# EAGLE board PCB_Openbook (EAGLE 9.7.0)
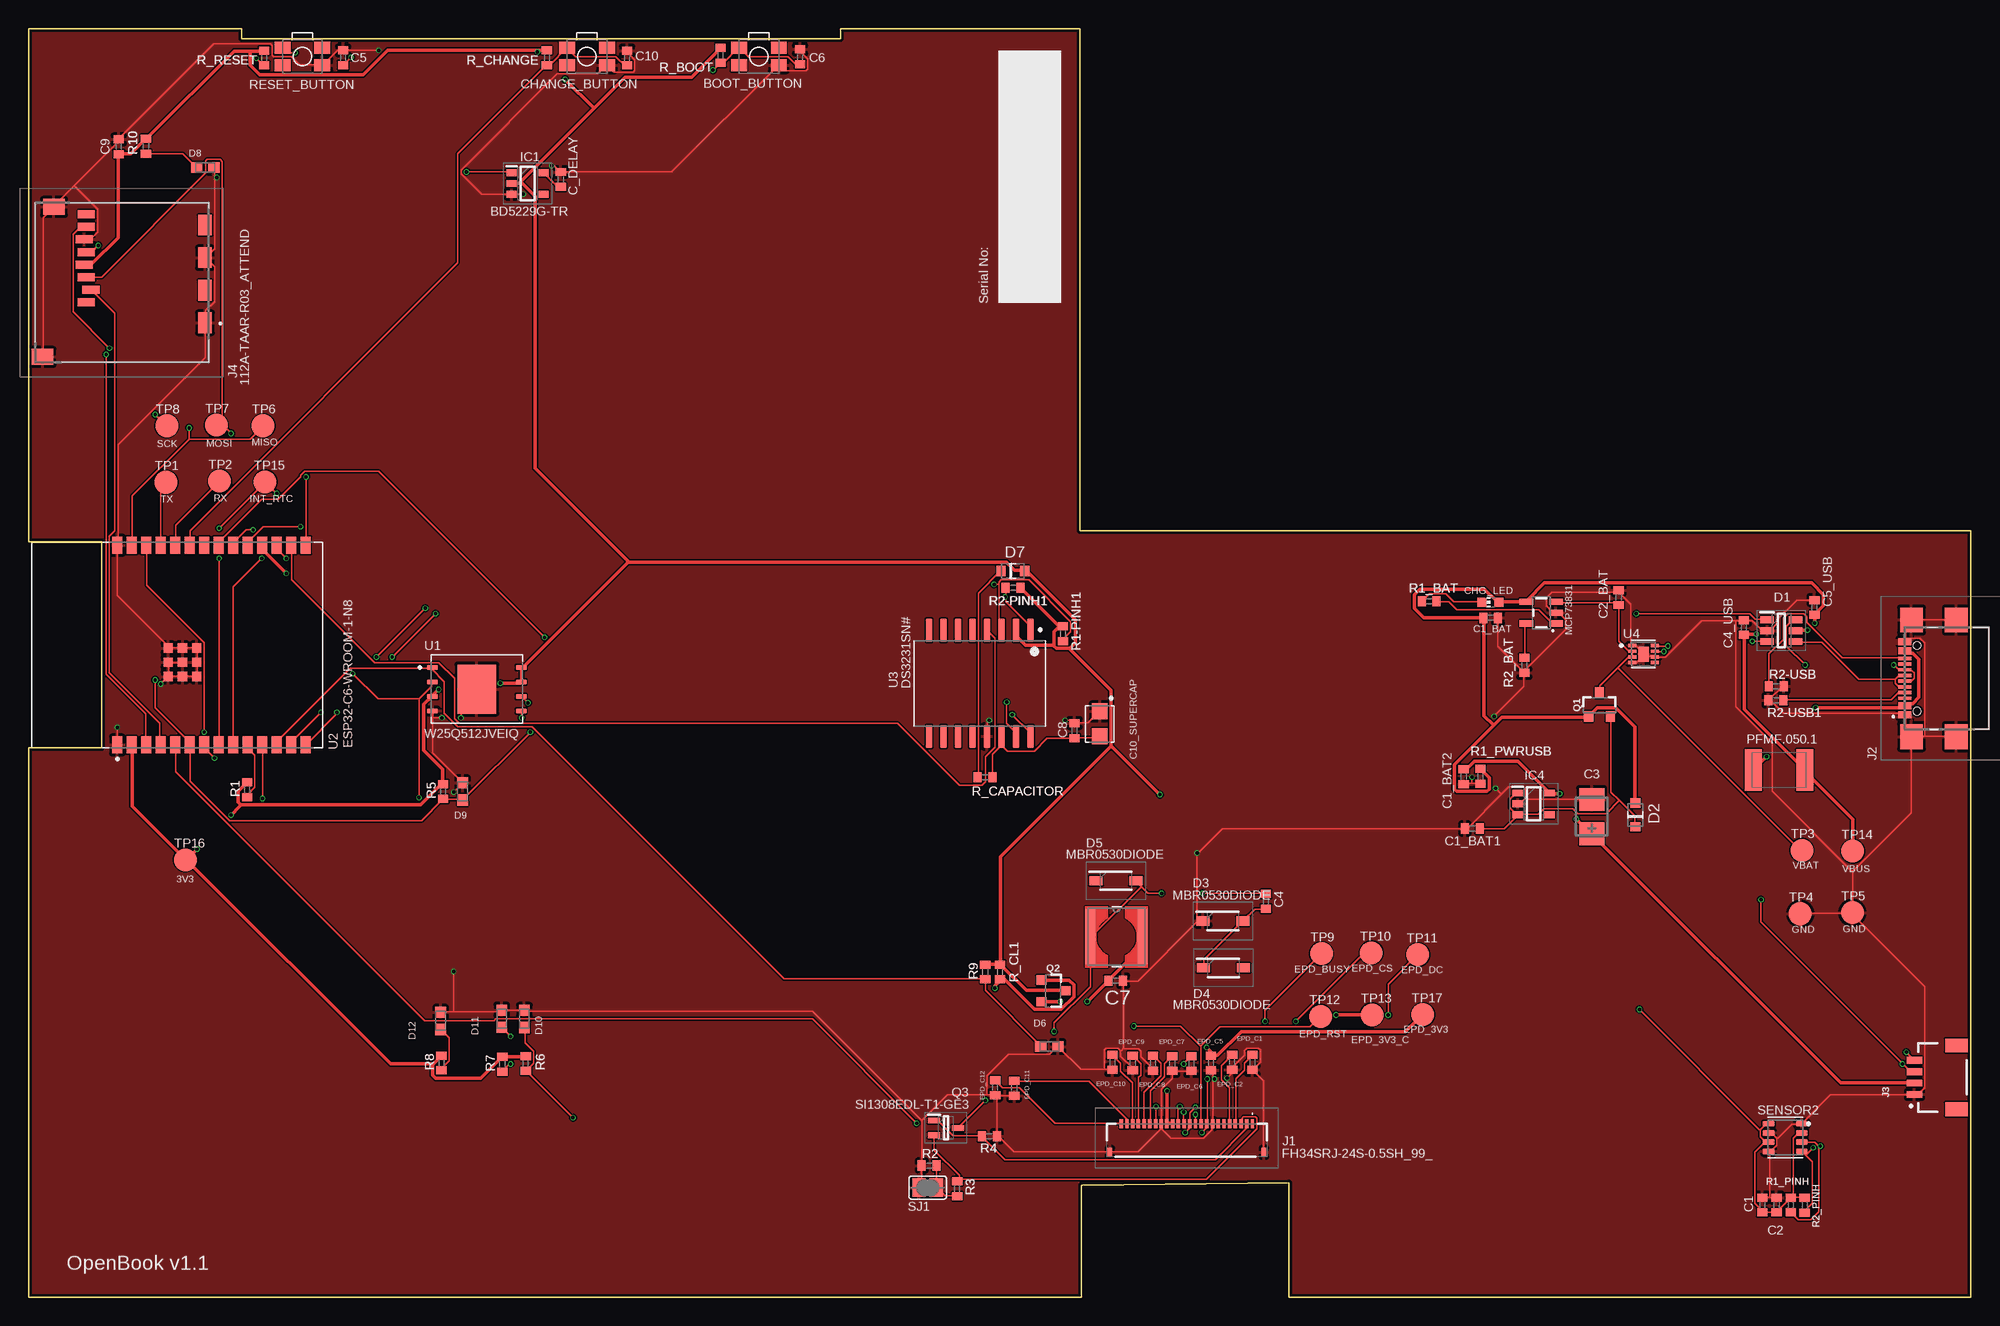
[diagram p0: board, top side]
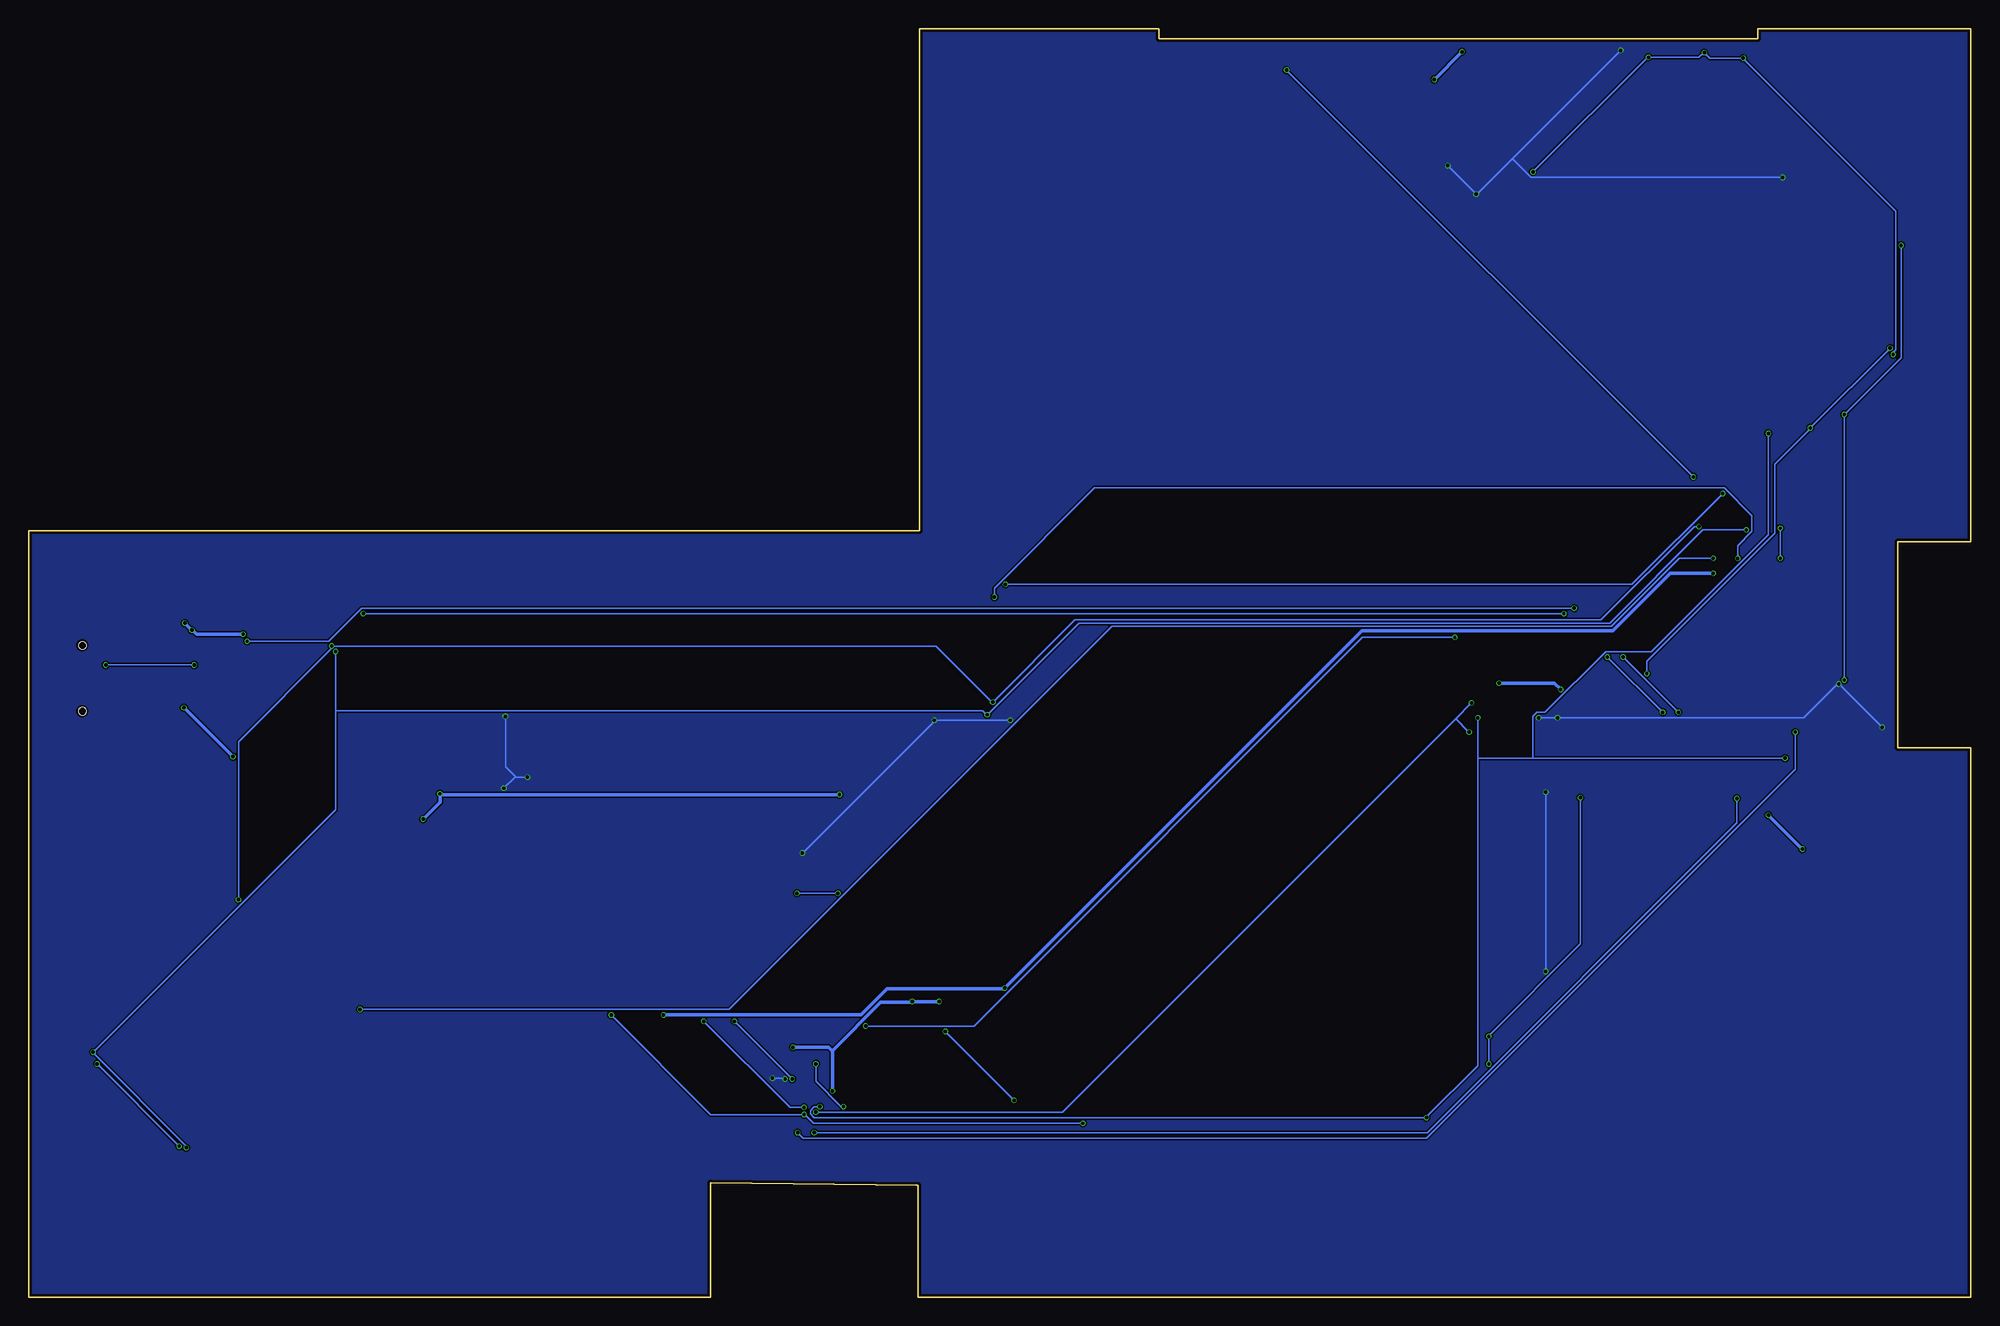
[diagram p1: board, bottom side, seen from below]

Size 170.3 x 111.2 mm. Coordinates in mm from the lower left corner, seen from the top.
Outline: 0,111.2 18.7,111.2 18.7,110.3 71.2,110.3 71.2,111.2 92.2,111.2 92.2,67.2 170.3,67.2 170.3,0.01 110.5,0.01 110.5,10.01 92.39,9.81 92.3,9.81 92.3,0 0,0 0,48.15 6.4,48.15 6.4,66.2 0,66.2 0,111.2
Copper layers (1*16): Top 0.035mm / dielectric 1.6mm / Bottom 0.035mm
Design rules "jlcpcb-2layers.dru": minimum track width 0.15mm, minimum drill 0.3mm, track to track 5mil, track to pad 5mil, pad to pad 5mil, via to via 5mil, smd to smd 5mil, copper to edge 0.2mm, drill to drill 0.2mm, minimum pad ring 10mil, minimum via ring 3mil, stop-mask expansion 4mil, vias tented up to drill 0mil, thermal gap 10mil
Net classes: 1 power: width 0.3 mm

## Footprints (pad centres in the part's own frame; a part is rotated, then mirrored left to right if it is on the bottom)
MYBUTTON = smd 1.4 x 1.05: 1 1.75,0.75; 2 -1.75,0.75; 3 -1.75,-0.75; 4 1.75,-0.75
EAGLE-LTSPICE_C0402 = smd 0.7 x 0.9: 1 -0.65,0; 2 0.65,0
RCL_CT3528 = smd 2 x 2.2: + -1.5,0; - 1.5,0
CAPCP3225X100N = smd 1.4 x 1.4: 1 -1.1,0; 2 1.1,0
ADAFRUIT_CHIP-LED0603 = smd 0.8 x 0.8: A 0,-0.75; C 0,0.75
SOT95P280X145-6N = smd 1.2 x 0.6: 1 -1.25,0.95; 2 -1.25,0; 3 -1.25,-0.95; 4 1.25,-0.95; 5 1.25,0; 6 1.25,0.95
ESP32_WROVER_AVX---SD0805S020S1R0_AVX_SD0805S020S1R0_0 = smd 0.8 x 0.9: 1 -1.05,0; 2 1.05,0
SOD3716X135N = smd 1.15 x 0.8: 1 -1.75,0; 2 1.75,0
DIOC1608X36N = smd 0.97 x 0.94: 1 -0.75,0; 2 0.75,0
SOT95P280X125-5N = smd 0.9 x 0.6: 1 -1.4,0.95; 2 -1.4,0; 3 -1.4,-0.95; 4 1.4,-0.95; 5 1.4,0.95
SOT95P280X120-5N = smd 0.9 x 0.6: 1 -1.4,0.95; 2 -1.4,0; 3 -1.4,-0.95; 4 1.4,-0.95; 5 1.4,0.95
FH34SRJ24S05SH99 = smd 0.3 x 0.8: 1 5.75,1.45; 2 5.25,1.45; 3 4.75,1.45; 4 4.25,1.45; 5 3.75,1.45; 6 3.25,1.45; 7 2.75,1.45; 8 2.25,1.45; 9 1.75,1.45; 10 1.25,1.45; 11 0.75,1.45; 12 0.25,1.45; 13 -0.25,1.45; 14 -0.75,1.45; 15 -1.25,1.45; 16 -1.75,1.45; 17 -2.25,1.45; 18 -2.75,1.45; 19 -3.25,1.45; 20 -3.75,1.45; 21 -4.25,1.45; 22 -4.75,1.45; 23 -5.25,1.45; 24 -5.75,1.45 | smd 0.4 x 0.8: MP1 6.75,-1.05; MP2 -6.75,-1.05
SAMACSYS_PARTS_USB4110GFA = smd 0.3 x 1.15: A1 -3.35,3.678; A4 -2.55,3.678; A5 -1.25,3.678; A6 -0.25,3.678; A7 0.25,3.678; A8 1.25,3.678; A9 2.55,3.678; A12 3.35,3.678; B1 3.05,3.678; B4 2.25,3.678; B5 1.75,3.678; B6 0.75,3.678; B7 -0.75,3.678; B8 -1.75,3.678; B9 -2.25,3.678; B12 -3.05,3.678 | smd 2.18 x 2: MP1 -5.11,-0.827; MP2 5.11,-0.827; MP3 -5.11,3.103; MP4 5.11,3.103 | hole 0.65: -2.89,2.603; 2.89,2.603
JST04_1MM_RA = smd 0.6 x 1.35: 1 -1.5,0; 2 -0.5,0; 3 0.5,0; 4 1.5,0 | smd 1.2 x 2: NC1 2.8,-3.675; NC2 -2.8,-3.675
112ATAARR03ATTEND = smd 1.8 x 1.2: G1 10.6,10.4; G2 4.9,10.4; S1 7.75,10.4; S2 2.05,10.4 | smd 1.4 x 1.9: G3 13.6,-3.85; G4 0.45,-2.85 | smd 0.7 x 1.5: P1 8.8,0; P2 7.7,0.4; P3 6.6,0; P4 5.5,-0.2; P5 4.4,0; P6 3.3,-0.2; P7 2.2,0; P8 1.1,0
IND_4828-WE-TPC_WRE = smd 0.889 x 4.826: 1 -2.286,0; 2 2.286,0
ESP32_WROVER_SPARKFUN-IC-POWER_SOT23-5 = smd 0.55 x 1.2: 1 -0.95,-1.3; 2 0,-1.3; 3 0.95,-1.3; 4 0.95,1.3; 5 -0.95,1.3
ESP32C6_VARISTOR_CT/CN1812 = smd 1.5 x 3.6: 1 -2.25,0; 2 2.25,0
ESP32_WROVER_SPARKFUN-DISCRETESEMI_SOT23-3 = smd 0.8 x 0.9: 1 -0.95,-1; 2 0.95,-1; 3 0,1.1
SOT65P210X110-3N = smd 1.05 x 0.5: 1 -1.05,0.65; 2 -1.05,-0.65; 3 1.05,0
ESP32_WROVER_EAGLE-LTSPICE_R0402 = smd 0.7 x 0.9: 1 -0.65,0; 2 0.65,0
ESP32_WROVER_BME680_PSON80P300X300X100-8N = smd 1.016 x 0.5: 1 1.458,1.2; 2 1.458,0.4; 3 1.458,-0.4; 4 1.458,-1.2; 5 -1.458,-1.22; 6 -1.458,-0.4; 7 -1.458,0.4; 8 -1.458,1.2
SJ = smd 1.168 x 1.6: 1 -0.762,0; 2 0.762,0
TP20R = smd 2 x 2: TP 0,0
SON127P600X800X80-9N = smd 0.94 x 0.44: 1 -3.895,1.905; 2 -3.895,0.635; 3 -3.895,-0.635; 4 -3.895,-1.905; 5 3.895,-1.905; 6 3.895,-0.635; 7 3.895,0.635; 8 3.895,1.905 | smd 3.4 x 4.3: 9 0,0
XCVR_ESP32-C6-WROOM-1-N8 = smd 1.5 x 0.9: 1 -8.75,5.26; 2 -8.75,3.99; 3 -8.75,2.72; 4 -8.75,1.45; 5 -8.75,0.18; 6 -8.75,-1.09; 7 -8.75,-2.36; 8 -8.75,-3.63; 9 -8.75,-4.9; 10 -8.75,-6.17; 11 -8.75,-7.44; 12 -8.75,-8.71; 13 -8.75,-9.98; 14 -8.75,-11.25; 15 8.75,-11.25; 16 8.75,-9.98; 17 8.75,-8.71; 18 8.75,-7.44; 19 8.75,-6.17; 20 8.75,-4.9; 21 8.75,-3.63; 22 8.75,-2.36; 23 8.75,-1.09; 24 8.75,0.18; 25 8.75,1.45; 26 8.75,2.72; 27 8.75,3.99; 28 8.75,5.26 | smd 0.8 x 0.8: 29_1 -2.755,0.79; 29_2 -1.505,0.79; 29_3 -0.255,0.79; 29_4 -2.755,-0.46; 29_5 -1.505,-0.46; 29_6 -0.255,-0.46; 29_7 -2.755,-1.71; 29_8 -1.505,-1.71; 29_9 -0.255,-1.71
SOIC127P1032X265-16N = smd 2.05 x 0.59: 1 -4.655,4.445; 2 -4.655,3.175; 3 -4.655,1.905; 4 -4.655,0.635; 5 -4.655,-0.635; 6 -4.655,-1.905; 7 -4.655,-3.175; 8 -4.655,-4.445; 9 4.655,-4.445; 10 4.655,-3.175; 11 4.655,-1.905; 12 4.655,-0.635; 13 4.655,0.635; 14 4.655,1.905; 15 4.655,3.175; 16 4.655,4.445
SON50P200X200X80-9N = smd 0.76 x 0.27: 1 -0.985,0.75; 2 -0.985,0.25; 3 -0.985,-0.25; 4 -0.985,-0.75; 5 0.985,-0.75; 6 0.985,-0.25; 7 0.985,0.25; 8 0.985,0.75 | smd 0.9 x 1.3: 9 0,0

## Placement (x,y rotation side)
BOOT_BUTTON  BUTTON_CUSYOMV1BUTTON  [MYBUTTON]  64.03,108.75 180 top
C1  100nF  [EAGLE-LTSPICE_C0402]  152,8.08 90 top
C1_BAT  4.7uF  [EAGLE-LTSPICE_C0402]  128.18,59.54 0 top
C1_BAT1  4.7uF  [EAGLE-LTSPICE_C0402]  126.58,41.08 180 top
C1_BAT2  4.7uF  [EAGLE-LTSPICE_C0402]  125.82,45.62 270 top
C2  100nF  [EAGLE-LTSPICE_C0402]  153.25,8.08 90 top
C2_BAT  4.7uF  [EAGLE-LTSPICE_C0402]  139.41,61.32 90 top
C3  100uF TANT  [RCL_CT3528]  137.04,42.12 90 top
C4  4.7uF/25V  [EAGLE-LTSPICE_C0402]  108.49,34.7 90 top
C4_USB  100nF  [EAGLE-LTSPICE_C0402]  150.38,58.71 90 top
C5  1uF  [EAGLE-LTSPICE_C0402]  27.6,108.64 90 top
C5_USB  4.7uF  [EAGLE-LTSPICE_C0402]  156.58,60.46 90 top
C6  100nF  [EAGLE-LTSPICE_C0402]  67.65,108.72 90 top
C7  10uF  [EAGLE-LTSPICE_C0402]  95.31,27.74 0 top
C8  100nF  [EAGLE-LTSPICE_C0402]  91.71,49.66 90 top
C9  100nF  [EAGLE-LTSPICE_C0402]  7.91,100.84 90 top
C10  100nF  [EAGLE-LTSPICE_C0402]  52.49,108.62 90 top
C10_SUPERCAP  CPH3225A  [CAPCP3225X100N]  93.92,50.25 270 top
C_DELAY  100nF  [EAGLE-LTSPICE_C0402]  46.67,97.97 90 top
CHANGE_BUTTON  BUTTON_CUSYOMV1BUTTON  [MYBUTTON]  48.96,108.75 180 top
CHG_LED  [ADAFRUIT_CHIP-LED0603]  128.15,60.92 90 top
D1  USBLC6-2SC6Y  [SOT95P280X145-6N]  153.68,58.43 0 top
D2  SD0805S020S1R0  [ESP32_WROVER_AVX---SD0805S020S1R0_AVX_SD0805S020S1R0_0]  140.88,42.27 90 top
D3  MBR0530DIODE  [SOD3716X135N]  104.71,32.98 0 top
D4  MBR0530DIODE  [SOD3716X135N]  104.76,28.86 0 top
D5  MBR0530DIODE  [SOD3716X135N]  95.34,36.51 0 top
D6  PGB1010603MRDIODE  [DIOC1608X36N]  89.49,21.97 0 top
D7  SD0805S020S1R0  [ESP32_WROVER_AVX---SD0805S020S1R0_AVX_SD0805S020S1R0_0]  86.3,63.66 0 top
D8  PGB1010603MRDIODE  [DIOC1608X36N]  15.51,99.02 0 top
D9  PGB1010603MRDIODE  [DIOC1608X36N]  38.06,44.33 90 top
D10  PGB1010603MRDIODE  [DIOC1608X36N]  43.47,24.39 90 top
D11  PGB1010603MRDIODE  [DIOC1608X36N]  41.49,24.42 90 top
D12  PGB1010603MRDIODE  [DIOC1608X36N]  36.13,24.21 90 top
EPD_C1  1uF/50V  [EAGLE-LTSPICE_C0402]  107.3,20.58 90 top
EPD_C2  1uF/50V  [EAGLE-LTSPICE_C0402]  105.52,20.61 90 top
EPD_C5  0.1uF/50V  [EAGLE-LTSPICE_C0402]  103.67,20.53 90 top
EPD_C6  1uF/50V  [EAGLE-LTSPICE_C0402]  101.97,20.48 90 top
EPD_C7  1uF/50V  [EAGLE-LTSPICE_C0402]  100.27,20.48 90 top
EPD_C8  1uF/50V  [EAGLE-LTSPICE_C0402]  98.59,20.5 90 top
EPD_C9  1uF/50V  [EAGLE-LTSPICE_C0402]  96.81,20.53 90 top
EPD_C10  1uF/50V  [EAGLE-LTSPICE_C0402]  95.03,20.58 90 top
EPD_C11  1uF/50V  [EAGLE-LTSPICE_C0402]  86.42,18.32 90 top
EPD_C12  1uF/50V  [EAGLE-LTSPICE_C0402]  84.75,18.37 90 top
IC1  BD5229G-TR  [SOT95P280X125-5N]  43.75,97.62 0 top
IC4  XC6220A331MR-G  [SOT95P280X120-5N]  131.96,43.24 0 top
J1  FH34SRJ-24S-0.5SH_99_  [FH34SRJ24S05SH99]  101.56,13.75 0 top
J2  SAMACSYS_PARTS_USB4110-GF-A  [SAMACSYS_PARTS_USB4110GFA]  168.19,54.25 90 top
J3  QWIIC_RIGHT_ANGLE  [JST04_1MM_RA]  165.35,19.27 90 top
J4  112A-TAAR-R03_ATTEND  [112ATAARR03ATTEND]  5.08,96.01 270 top
L1  68uH  [IND_4828-WE-TPC_WRE]  95.39,31.58 0 top
MCP73831  ESP32_WROVER_SPARKFUN-IC-POWER_MCP73831  [ESP32_WROVER_SPARKFUN-IC-POWER_SOT23-5]  132.62,60 90 top
PFMF.050.1  ESP32C6_VARISTORCN1812  [ESP32C6_VARISTOR_CT/CN1812]  153.48,46.21 0 top
Q1  20V/4.2A/52mΩ/1.4W  [ESP32_WROVER_SPARKFUN-DISCRETESEMI_SOT23-3]  137.73,51.9 0 top
Q2  20V/4.2A/52mΩ/1.4W  [ESP32_WROVER_SPARKFUN-DISCRETESEMI_SOT23-3]  89.8,26.85 270 top
Q3  SI1308EDL-T1-GE3  [SOT65P210X110-3N]  80.43,14.84 0 top
R1  10K  [ESP32_WROVER_EAGLE-LTSPICE_R0402]  19.16,44.48 90 top
R1-PINH1  10K  [ESP32_WROVER_EAGLE-LTSPICE_R0402]  90.69,58.15 90 top
R1_BAT  200  [ESP32_WROVER_EAGLE-LTSPICE_R0402]  122.79,60.99 0 top
R1_PINH  10K  [ESP32_WROVER_EAGLE-LTSPICE_R0402]  154.49,8.08 90 top
R1_PWRUSB  100K  [ESP32_WROVER_EAGLE-LTSPICE_R0402]  127.29,45.65 90 top
R2  2.2  [ESP32_WROVER_EAGLE-LTSPICE_R0402]  78.95,11.54 0 top
R2-PINH1  10K  [ESP32_WROVER_EAGLE-LTSPICE_R0402]  86.32,62.19 0 top
R2-USB  5k1  [ESP32_WROVER_EAGLE-LTSPICE_R0402]  153.22,53.55 0 top
R2-USB1  5k1  [ESP32_WROVER_EAGLE-LTSPICE_R0402]  153.2,52.33 0 top
R2_BAT  2K  [ESP32_WROVER_EAGLE-LTSPICE_R0402]  131.15,55.38 90 top
R2_PINH  10K  [ESP32_WROVER_EAGLE-LTSPICE_R0402]  155.71,8.06 90 top
R3  0.47  [ESP32_WROVER_EAGLE-LTSPICE_R0402]  81.42,9.51 90 top
R4  10K  [ESP32_WROVER_EAGLE-LTSPICE_R0402]  84.24,14.1 180 top
R5  10K  [ESP32_WROVER_EAGLE-LTSPICE_R0402]  36.36,44.33 90 top
R6  10K  [ESP32_WROVER_EAGLE-LTSPICE_R0402]  43.6,20.48 90 top
R7  10K  [ESP32_WROVER_EAGLE-LTSPICE_R0402]  41.54,20.43 90 top
R8  10K  [ESP32_WROVER_EAGLE-LTSPICE_R0402]  36.21,20.53 90 top
R9  10K  [ESP32_WROVER_EAGLE-LTSPICE_R0402]  83.88,28.5 90 top
R10  10K  [ESP32_WROVER_EAGLE-LTSPICE_R0402]  10.3,100.89 90 top
R_BOOT  10K  [ESP32_WROVER_EAGLE-LTSPICE_R0402]  60.67,108.84 90 top
R_CAPACITOR  15  [ESP32_WROVER_EAGLE-LTSPICE_R0402]  83.86,45.57 0 top
R_CHANGE  10K  [ESP32_WROVER_EAGLE-LTSPICE_R0402]  45.45,108.64 90 top
R_CL1  10K  [ESP32_WROVER_EAGLE-LTSPICE_R0402]  85.18,28.5 90 top
R_RESET  10K  [ESP32_WROVER_EAGLE-LTSPICE_R0402]  20.66,108.62 90 top
RESET_BUTTON  BUTTON_CUSYOMV1BUTTON  [MYBUTTON]  24.01,108.75 180 top
SENSOR2  BME688  [ESP32_WROVER_BME680_PSON80P300X300X100-8N]  154.01,14 0 top
SJ1  [SJ]  78.83,9.61 0 top
TP1  TPTP20R  [TP20R]  12.05,71.43 0 top
TP2  TPTP20R  [TP20R]  16.75,71.53 0 top
TP3  TPTP20R  [TP20R]  155.48,39.17 0 top
TP4  TPTP20R  [TP20R]  155.33,33.61 0 top
TP5  TPTP20R  [TP20R]  159.9,33.71 0 top
TP6  TPTP20R  [TP20R]  20.56,76.38 0 top
TP7  TPTP20R  [TP20R]  16.47,76.43 0 top
TP8  TPTP20R  [TP20R]  12.13,76.38 0 top
TP9  TPTP20R  [TP20R]  113.37,30.11 0 top
TP10  TPTP20R  [TP20R]  117.72,30.18 0 top
TP11  TPTP20R  [TP20R]  121.8,30.03 0 top
TP12  TPTP20R  [TP20R]  113.27,24.62 0 top
TP13  TPTP20R  [TP20R]  117.79,24.75 0 top
TP14  TPTP20R  [TP20R]  159.93,39.1 0 top
TP15  TPTP20R  [TP20R]  20.74,71.46 0 top
TP16  TPTP20R  [TP20R]  13.75,38.33 0 top
TP17  TPTP20R  [TP20R]  122.24,24.77 0 top
U1  W25Q512JVEIQ  [SON127P600X800X80-9N]  39.31,53.3 0 top
U2  ESP32-C6-WROOM-1-N8  [XCVR_ESP32-C6-WROOM-1-N8]  13.04,57.16 90 top
U3  DS3231SN#  [SOIC127P1032X265-16N]  83.4,53.8 270 top
U4  MAX17048G+T10  [SON50P200X200X80-9N]  141.59,56.37 0 top

## Library data of the parts
BOOT_BUTTON C1 C1_BAT C1_BAT1 C1_BAT2 C2 C2_BAT C4 C4_USB C5 C5_USB C6-C10 C_DELAY CHANGE_BUTTON CHG_LED D3-D6 D8-D12 EPD_C1 EPD_C2 EPD_C5-EPD_C12 PFMF.050.1 Q1 Q2 R1 R1-PINH1 R1_BAT R1_PINH R1_PWRUSB R2 R2-PINH1 R2-USB R2-USB1 R2_BAT R2_PINH R3-R10 R_BOOT R_CAPACITOR R_CHANGE R_CL1 R_RESET RESET_BUTTON SJ1 = DeskAssistant v19 v1
C3 = DeskAssistant v19 v1; SPICEPREFIX: C
C10_SUPERCAP = DeskAssistant v19 v1; AVAILABILITY: Not in stock; CHECK_PRICES: https://www.snapeda.com/parts/CPH3225A/Seiko+Instruments/view-part/?ref=eda; DESCRIPTION: 11 mF (EDLC) Supercapacitor 3.3 V 1210 (3225 Metric) - -; MF: Seiko Instruments; MP: CPH3225A; PACKAGE: 1210 Seiko; PRICE: None; PURCHASE-URL: https://www.snapeda.com/api/url_track_click_mouser/?unipart_id=562593&manufacturer=Seiko Instruments&part_name=CPH3225A&search_term=None; SNAPEDA_LINK: https://www.snapeda.com/parts/CPH3225A/Seiko+Instruments/view-part/?ref=snap
D1 = DeskAssistant v19 v1; AVAILABILITY: In Stock; CHECK_PRICES: https://www.snapeda.com/parts/USBLC6-2SC6Y/STMicroelectronics/view-part/?ref=eda; DESCRIPTION: 17V Clamp 5A (8/20µs) Ipp Tvs Diode Surface Mount SOT-23-6; MF: STMicroelectronics; MP: USBLC6-2SC6Y; PACKAGE: SOT-23-6 STMicroelectronics; PRICE: None; SNAPEDA_LINK: https://www.snapeda.com/parts/USBLC6-2SC6Y/STMicroelectronics/view-part/?ref=snap
D2 D7 = DeskAssistant v19 v1; CENTROID_NOT_SPECIFIED: No; DATASHEET: http://datasheets.avx.com/schottky.pdf; DIGIKEY_DESCRIPTION: DIODE SCHOTTKY 20V 1A 0805; DIGIKEY_PART_NUMBER: 478-7800-1-ND; LEAD_FREE: yes; MF: AVX; MOUSER_PART_NUMBER: 581-SD0805S020S1R0; PACKAGE: 0805 (2012 metric); PREFIX: D; ROHS: yes; TEMPERATURE_RANGE_HIGH: +125°C; TEMPERATURE_RANGE_LOW: -55°C
IC1 = DeskAssistant v19 v1; DESCRIPTION: Voltage Detector with Adjustable Delay Time: CMOS processes are utilized to develop high precision, low current consumption CMOS reset ICs that allow arbitrary setting of the delay time. The extensive lineup includes both Nch Open Drain and CMOS output types in a wide range of detection voltages (from 2.3V to 6.0V, in 0.1V steps), enabling selection of the ideal solution based on customer requirements. In addition, the entire series is of course both lead-free and RoHS-compliant.; HEIGHT: 1.25mm; MANUFACTURER_NAME: ROHM Semiconductor; MANUFACTURER_PART_NUMBER: BD5229G-TR; MOUSER_PART_NUMBER: 755-BD5229G-TR; MOUSER_PRICE-STOCK: https://www.mouser.co.uk/ProductDetail/ROHM-Semiconductor/BD5229G-TR?qs=4kLU8WoGk0vvnhrrYwdszw%3D%3D
IC4 = DeskAssistant v19 v1; DESCRIPTION: LDO Voltage Regulators; HEIGHT: 1.2mm; MANUFACTURER_NAME: Torex; MANUFACTURER_PART_NUMBER: XC6220A331MR-G; MOUSER_PART_NUMBER: 865-XC6220A331MR-G; MOUSER_PRICE-STOCK: https://www.mouser.co.uk/ProductDetail/Torex-Semiconductor/XC6220A331MR-G?qs=AsjdqWjXhJ8ZSWznL1J0gg%3D%3D
J1 = DeskAssistant v19 v1; DESCRIPTION: 24 Position FFC, FPC Connector Contacts, Top and Bottom 0.020" (0.50mm) Surface Mount, Right Angle; HEIGHT: 1.1mm; MANUFACTURER_NAME: Hirose; MANUFACTURER_PART_NUMBER: FH34SRJ-24S-0.5SH(99); MOUSER_PART_NUMBER: 798-FH34SRJ24S05SH99; MOUSER_PRICE-STOCK: https://www.mouser.co.uk/ProductDetail/Hirose-Connector/FH34SRJ-24S-0.5SH99?qs=vcbW%252B4%252BSTIpKBl5ap9J8Fw%3D%3D
J2 = DeskAssistant v19 v1; DESCRIPTION: CONN USB 2.0 TYPE-C R/A SMT; HEIGHT: 3.26mm; MANUFACTURER_NAME: GCT (GLOBAL CONNECTOR TECHNOLOGY); MANUFACTURER_PART_NUMBER: USB4110-GF-A; MOUSER_PART_NUMBER: 640-USB4110-GF-A; MOUSER_PRICE-STOCK: https://www.mouser.co.uk/ProductDetail/GCT/USB4110-GF-A?qs=KUoIvG%2F9IlYiZvIXQjyJeA%3D%3D
J3 = DeskAssistant v19 v1; PROD_ID: CONN-13694
J4 = DeskAssistant v19 v1; DESCRIPTION: Micro SD Card Socket, Push-Push Type, Top Mount, SMT, H=1.83mm, 10u; HEIGHT: 1.9mm; MANUFACTURER_NAME: ATTEND; MANUFACTURER_PART_NUMBER: 112A-TAAR-R03 ATTEND
L1 = DeskAssistant v19 v1; COPYRIGHT: Copyright (C) 2024 Ultra Librarian. All rights reserved.; MANUFACTURER_PART_NUMBER: 744043680; MFR_NAME: Wurth Electronics
MCP73831 = DeskAssistant v19 v1; PROD_ID: IC-09995
Q3 = DeskAssistant v19 v1; AVAILABILITY: In Stock; CHECK_PRICES: https://www.snapeda.com/parts/SI1308EDL-T1-GE3/Vishay+Siliconix/view-part/?ref=eda; DESCRIPTION: Si1308EDL-T1-GE3 N-channel MOSFET Transistor, 1.5 A, 30 V, 3-Pin SC-70 | Siliconix / Vishay SI1308EDL-T1-GE3; MF: Vishay Siliconix; MP: SI1308EDL-T1-GE3; PACKAGE: SOT-323 Vishay Semiconductor; PRICE: None; PURCHASE-URL: https://www.snapeda.com/api/url_track_click_mouser/?unipart_id=274603&manufacturer=Vishay Siliconix&part_name=SI1308EDL-T1-GE3&search_term=None; SNAPEDA_LINK: https://www.snapeda.com/parts/SI1308EDL-T1-GE3/Vishay+Siliconix/view-part/?ref=snap
SENSOR2 = DeskAssistant v19 v1; AVAILABILITY: Unavailable; DESCRIPTION: Integrated Environmental Unit; MF: Bosch Sensortec; MP: BME680; PACKAGE: LGA-8 Bosch Tools; PRICE: None
TP1 = DeskAssistant v19 v1; 3DNAME: TX
TP2 = DeskAssistant v19 v1; 3DNAME: RX
TP3 = DeskAssistant v19 v1; 3DNAME: VBAT
TP4 TP5 = DeskAssistant v19 v1; 3DNAME: GND
TP6 = DeskAssistant v19 v1; 3DNAME: MISO
TP7 = DeskAssistant v19 v1; 3DNAME: MOSI
TP8 = DeskAssistant v19 v1; 3D_NAME: SCK
TP9 = DeskAssistant v19 v1; 3DNAME: EPD_BUSY
TP10 = DeskAssistant v19 v1; 3DNAME: EPD_CS
TP11 = DeskAssistant v19 v1; 3DNAME: EPD_DC
TP12 = DeskAssistant v19 v1; 3DNAME: EPD_RST
TP13 = DeskAssistant v19 v1; 3DNAME: EPD_3V3_C
TP14 = DeskAssistant v19 v1; 3DNAME: VBUS
TP15 = DeskAssistant v19 v1; 3DNAME: INT_RTC
TP16 = DeskAssistant v19 v1; 3DNAME: 3V3
TP17 = DeskAssistant v19 v1; 3DNAME: EPD_3V3
U1 = DeskAssistant v19 v1; AVAILABILITY: In Stock; CHECK_PRICES: https://www.snapeda.com/parts/W25Q512JVEIQ/Winbond+Electronics/view-part/?ref=eda; DESCRIPTION: FLASH - NOR Memory IC 512Mb (64M x 8) SPI - Quad I/O 133 MHz 8-WSON (8x6); MF: Winbond Electronics; MP: W25Q512JVEIQ; PACKAGE: Package; PRICE: None; SNAPEDA_LINK: https://www.snapeda.com/parts/W25Q512JVEIQ/Winbond+Electronics/view-part/?ref=snap
U2 = DeskAssistant v19 v1; AVAILABILITY: In Stock; CHECK_PRICES: https://www.snapeda.com/parts/ESP32-C6-WROOM-1-N8/Espressif+Systems/view-part/?ref=eda; DESCRIPTION: Multiprotocol Modules ESP32-C6 module, Wi-Fi 6 in 2.4 GHz band, Bluetooth 5, Zigbee 3.0 and Thread. ESP34-WROOM Compatible - ENGINEERING SAMPLE; MF: Espressif Systems; MP: ESP32-C6-WROOM-1-N8; PACKAGE: None; PRICE: None; SNAPEDA_LINK: https://www.snapeda.com/parts/ESP32-C6-WROOM-1-N8/Espressif+Systems/view-part/?ref=snap
U3 = DeskAssistant v19 v1; AVAILABILITY: In Stock; CHECK_PRICES: https://www.snapeda.com/parts/DS3231SN%23/Analog+Devices/view-part/?ref=eda; DESCRIPTION: Extremely Accurate I²C-Integrated RTC/TCXO/Crystal; MF: Analog Devices; MP: DS3231SN#; PACKAGE: SOIC-16 Maxim; PRICE: None; PURCHASE-URL: https://www.snapeda.com/api/url_track_click_mouser/?unipart_id=99048&manufacturer=Analog Devices&part_name=DS3231SN#&search_term=None; SNAPEDA_LINK: https://www.snapeda.com/parts/DS3231SN%23/Analog+Devices/view-part/?ref=snap
U4 = DeskAssistant v19 v1; AVAILABILITY: In Stock; CHECK_PRICES: https://www.snapeda.com/parts/MAX17048G+T10/Analog+Devices/view-part/?ref=eda; DESCRIPTION: 3µA 1-Cell/2-Cell Fuel Gauge with ModelGauge; MF: Analog Devices; MP: MAX17048G+T10; PACKAGE: TDFN-8 Maxim; PRICE: None; PURCHASE-URL: https://www.snapeda.com/api/url_track_click_mouser/?unipart_id=329239&manufacturer=Analog Devices&part_name=MAX17048G+T10&search_term=None; SNAPEDA_LINK: https://www.snapeda.com/parts/MAX17048G+T10/Analog+Devices/view-part/?ref=snap

## Nets
3V3 [power]: C1_BAT2.1 C3.+ C9.1 D7.2 IC1.2 IC4.5 J3.2 J4.P4 Q2.3 R1-PINH1.2 R1.2 R2-PINH1.2 R5.2 R6.2 R7.2 R8.2 R9.2 R10.2 R_BOOT.2 R_CHANGE.2 R_CL1.2 R_RESET.2 TP16.TP U1.3 U1.7 U1.8 U2.2 U3.2
32KHZ: R2-PINH1.1 U2.9 U3.1
DN: D1.4 J2.A7 J2.B7
DP: D1.6 J2.A6 J2.B6
EPD_3V3 [power]: C7.1 EPD_C5.2 J1.15 J1.16 L1.2 Q2.2 TP17.TP
EPD_3V3_C [power]: Q2.1 R_CL1.1 TP13.TP U2.18
EPD_BUSY: J1.9 TP9.TP U2.26
EPD_CS: J1.12 TP10.TP U2.11
EPD_DC: J1.11 TP11.TP U2.5
EPD_RST: J1.10 TP12.TP U2.21
FLASH_CS: D6.1 R9.1 U1.1 U2.12
GDR: J1.2 Q3.1 R4.2
GND: BOOT_BUTTON.2 C1.2 C1_BAT1.2 C1_BAT2.2 C1_BAT.2 C2.2 C2_BAT.2 C3.- C4_USB.2 C5.2 C5_USB.2 C6.2 C7.2 C8.2 C9.2 C10.2 C10_SUPERCAP.1 C_DELAY.2 CHANGE_BUTTON.2 D1.2 D3.1 D6.2 D8.2 D9.2 D10.2 D11.2 D12.2 EPD_C1.1 EPD_C2.1 EPD_C5.1 EPD_C6.1 EPD_C7.1 EPD_C8.1 EPD_C9.1 EPD_C10.1 EPD_C11.1 EPD_C12.1 IC1.3 IC4.2 J1.8 J1.17 J1.MP1 J1.MP2 J2.A1 J2.A12 J2.B1 J2.B12 J2.MP1 J2.MP2 J2.MP3 J2.MP4 J3.1 J4.G1 J4.G2 J4.G3 J4.G4 J4.P6 MCP73831.2 R1_PWRUSB.1 R2-USB1.1 R2-USB.2 R2.1 R2_BAT.1 R4.1 RESET_BUTTON.2 SENSOR2.1 SENSOR2.5 SENSOR2.7 SJ1.1 TP4.TP TP5.TP U1.4 U1.9 U2.1 U2.28 U2.29_1 U2.29_2 U2.29_3 U2.29_4 U2.29_5 U2.29_6 U2.29_7 U2.29_8 U2.29_9 U3.13 U4.1 U4.4 U4.6 U4.9
GPIO8: R1.1 U2.10
I2C_PW: C1.1 C2.1 R1_PINH.2 R2_PINH.2 SENSOR2.2 SENSOR2.6 SENSOR2.8 U2.17
INT_RTC: R1-PINH1.1 TP15.TP U2.8 U3.3
IO/BOOT: BOOT_BUTTON.4 C6.1 R_BOOT.1 U2.15
IO/CHANGE: C10.1 CHANGE_BUTTON.4 R_CHANGE.1 U2.23
MISO: D11.1 J4.P7 R7.1 TP6.TP U1.2 U2.27
MOSI: D10.1 J1.14 J4.P3 R6.1 TP7.TP U1.5 U2.7
N$1: J2.A5 R2-USB1.2
N$2: J2.B5 R2-USB.1
N$4: C1_BAT1.1 D2.1 IC4.1 IC4.3 Q1.2
N$5: EPD_C12.2 J1.24
N$6: C4.1 D3.2 D4.1
N$7: MCP73831.5 R2_BAT.2
N$8: CHG_LED.C R1_BAT.1
N$9: MCP73831.1 R1_BAT.2
N$10: EPD_C11.2 J1.23
N$11: EPD_C10.2 J1.22
N$12: EPD_C9.2 J1.21
N$13: EPD_C8.2 J1.20
N$14: EPD_C7.2 J1.19
N$15: EPD_C6.2 J1.18
N$16: EPD_C2.2 J1.5
N$17: EPD_C1.2 J1.4
N$18: C_DELAY.1 IC1.5
N$19: D7.1 R_CAPACITOR.1
N$21: D12.1 R8.1
PREVGH: D5.1
PREVGL: D4.2
RESE: J1.3 Q3.2 R3.2
RESE': R2.2 R3.1 SJ1.2
RESET: C5.1 IC1.1 R_RESET.1 RESET_BUTTON.4 U2.3
RTC_RST: U2.16 U3.4
RX: TP2.TP U2.24
SCK: D9.1 J1.13 J4.P5 R5.1 TP8.TP U1.6 U2.6
SCL: J3.4 R2_PINH.1 SENSOR2.4 U2.20 U3.16 U4.7
SDA: J3.3 R1_PINH.1 SENSOR2.3 U2.19 U3.15 U4.8
SRC: C4.2 D5.2 L1.1 Q3.3
SS_SD: J4.P2 U2.4
SS_SD1: D8.1 R10.1
TX: TP1.TP U2.25
USB_D+: D1.1 U2.14
USB_D-: D1.3 U2.13
VBAT: C2_BAT.1 MCP73831.3 Q1.3 TP3.TP U4.2 U4.3
VBUS [power]: C1_BAT.1 C4_USB.1 C5_USB.1 CHG_LED.A D1.5 D2.2 MCP73831.4 PFMF.050.1.2 Q1.1 R1_PWRUSB.2 TP14.TP
VRTC: C8.1 C10_SUPERCAP.2 R_CAPACITOR.2 U3.14
VUSB [power]: J2.A4 J2.A9 J2.B4 J2.B9 PFMF.050.1.1

## Tracks (layer width: path | path; a pad name or v marks a point on that pad's centre or on a via)
3V3  (via drill 0.3)
  Top 0.3: 49.58,104.2 52.31,106.94 58.13,106.94 60.62,109.43 R_BOOT.2 | 49.58,104.2 43.13,97.76 | 43.13,97.76 43.03,97.66 42.41,97.66 IC1.2 | 19.42,109.22 18.03,109.22 10.41,101.61 R10.2 10.28,101.54 8.96,100.22 7.92,100.22 C9.1 7.85,100.08 7.85,92.88 5.5,90.53 4.94,90.53 J4.P4 | 19.42,109.22 20.59,109.22 R_RESET.2 | 44.62,109.29 31.47,109.29 29.32,107.14 20.25,107.14 19.42,107.98 19.42,109.22 | 44.62,109.29 45.39,109.29 R_CHANGE.2 | v47.05,106.73 49.58,104.2 | v44.62,109.15 44.62,109.29 | C1_BAT2.1 125.85,46.34 126.13,46.34 126.75,46.97 130.56,46.97 133.33,44.2 IC4.5 133.47,44.13 v134.23,44.13 | J3.2 165.33,18.78 158.89,18.78 137.07,40.6 C3.+ 136.94,40.66 v135.69,41.91 | R9.2 83.89,29.17 85.14,29.17 R_CL1.2 | Q2.3 90.88,26.88 87.49,26.88 85.27,29.1 R_CL1.2 | R2-PINH1.2 87,62.13 90.33,58.81 90.67,58.81 R1-PINH1.2 90.26,58.67 89.91,58.32 89.91,57.08 | 91.3,56.87 91.78,57.35 91.78,59.36 87.49,63.66 D7.2 87.21,63.72 86.45,63.72 85.76,64.42 52.59,64.42 | 91.3,56.87 90.12,56.87 89.91,57.08 | U3.2 86.59,58.39 86.59,57.98 87.42,57.15 89.78,57.15 89.91,57.08 | 94.9,48.28 85.2,38.59 85.2,29.31 R_CL1.2 | 94.9,48.28 94.9,53.2 91.37,56.73 91.3,56.87 | 18.59,43.16 18.38,43.37 18.38,44.34 19.14,45.1 R1.2 | 18.59,43.16 34.38,43.16 36.18,44.96 R5.2 36.31,45.03 36.31,46.27 34.65,47.94 34.65,51.95 35.34,52.64 U1.3 35.48,52.78 v35.97,53.27 | v41.37,53.82 43.1,53.82 U1.7 43.24,53.96 43.24,55.14 U1.8 43.38,55.21 52.59,64.42 | R6.2 43.59,21.07 41.58,21.07 R7.2 41.44,21 39.64,19.2 35.69,19.2 35.41,19.47 35.41,20.38 | 35.41,20.38 36.18,21.14 R8.2 | U2.2 9.1,48.35 9.1,43.02 13.74,38.38 TP16.TP
  Top 0.3: 35.41,20.38 35.28,20.44 31.74,20.44 13.88,38.31 TP16.TP | v17.76,42.26 18.52,43.02 18.59,43.16 | v14.78,39.28 13.95,38.45 TP16.TP | v99.19,44.06 95.04,48.21 94.9,48.28 | 43.13,97.76 44.42,96.48 44.42,72.66 52.52,64.56 52.59,64.42
  Bottom 0.3: v44.62,109.15 v47.05,106.73 | v135.69,41.91 134.23,43.37 v134.23,44.13 134.09,44.06 v99.19,44.06 | v41.37,53.82 36.52,53.82 v35.97,53.27 | v14.78,39.28 v17.76,42.26
32KHZ  (via drill 0.3)
  Top 0.15: 85.69,61.37 85.69,60.95 87.84,58.81 U3.1 | 85.69,61.37 85.69,62.13 R2-PINH1.1 | v20.46,64.76 17.96,62.27 17.96,48.42 U2.9 | v85.62,61.37 85.69,61.37
  Bottom 0.15: v20.46,64.76 20.46,65.87 19.21,67.12 19.21,68.5 21.63,70.93 76.83,70.93 85.62,62.13 v85.62,61.37
DN
  Top 0.15: 163.66,54.17 163.66,53.82 163.94,53.55 164.5,53.55 J2.B7 | 163.66,54.17 163.94,54.45 164.5,54.45 J2.A7 | 163.66,54.17 160.48,54.17 157.22,57.42 154.94,57.42 D1.4
DP  (via drill 0.3)
  Top 0.15: J2.A6 164.56,54.03 165.12,54.03 165.33,54.24 165.33,54.72 165.12,54.93 164.56,54.93 J2.B6 164.5,55.07 163.87,55.07 v163.53,55.41 | v155.77,55.41 154.11,57.08 154.11,58.81 154.66,59.36 154.87,59.36 D1.6
  Bottom 0.15: v163.53,55.41 v155.77,55.41
EPD_3V3  (via drill 0.3)
  Top 0.3: TP17.TP 122.18,24.74 120.73,23.28 106.33,23.28 104.25,21.21 103.69,21.21 EPD_C5.2 103.62,21.34 103.62,21.55 v103.28,21.9 | J1.15 100.3,15.25 99.82,15.25 J1.16 99.82,15.39 v99.82,18.09 | v90.47,25.91 88.81,25.91 Q2.2 | v92.82,25.91 94.62,27.71 C7.1 94.76,27.85 97.67,30.76 97.67,31.52 L1.2
  Bottom 0.3: v90.47,25.91 v92.82,25.91 92.96,25.85 95.59,25.85 99.82,21.62 | 99.82,21.62 v99.82,18.09 | v103.28,21.9 100.16,21.9 99.95,21.69 99.82,21.62
EPD_3V3_C  (via drill 0.3)
  Top 0.3: Q2.1 88.81,27.79 91.23,27.79 91.64,27.37 91.64,26.33 90.54,25.22 88.18,25.22 85.55,27.85 85.2,27.85 R_CL1.1 85.14,27.71 84.72,27.3 v84.72,27.09 | v22.6,63.45 20.52,65.53 20.52,65.87 U2.18 | v114.64,24.74 117.75,24.74 TP13.TP
  Bottom 0.3: v22.6,63.45 26.34,63.45 31.4,58.39 53.42,58.39 v84.72,27.09 84.86,27.02 95.04,27.02 97.32,24.74 v114.64,24.74
EPD_BUSY  (via drill 0.3)
  Top 0.15: v103.35,19.13 103.35,15.25 J1.9 103.28,15.18 103.28,14.83 v102.86,14.42 | v108.4,24.18 108.4,25.15 113.32,30.07 TP9.TP | v15.4,49.53 15.4,57.35 10.35,62.41 10.35,65.87 U2.26
  Bottom 0.15: v108.4,24.18 v103.35,19.13 | v15.4,49.53 15.4,46.27 47.74,13.93 102.38,13.93 v102.86,14.42
EPD_CS  (via drill 0.3)
  Top 0.15: v102.31,16.63 101.83,16.15 101.83,15.25 J1.12 101.75,15.18 101.75,14.77 v101.41,14.42 | v111.1,24.18 117.06,30.14 117.68,30.14 TP10.TP | v20.52,43.71 20.52,48.35 U2.11
  Bottom 0.15: v102.31,16.63 103.56,16.63 v111.1,24.18 | v20.52,43.71 20.52,41.56 47.67,14.42 v101.41,14.42
EPD_DC  (via drill 0.3)
  Top 0.15: v102.31,16.01 102.31,15.25 J1.11 | v119.21,24.74 119.21,27.44 121.77,30 TP11.TP | v77.86,15.25 68.72,24.39 40.95,24.39 40.82,24.25 34.72,24.25 12.91,46.07 12.91,48.35 U2.5
  Bottom 0.15: v119.21,24.74 110.48,16.01 v102.31,16.01 102.24,16.01 101.48,15.25 v77.86,15.25
EPD_RST  (via drill 0.3)
  Top 0.15: 102.79,22.04 102.79,15.25 J1.10 | 102.79,22.04 104.46,23.7 112.35,23.7 113.25,24.6 TP12.TP | v45.25,57.84 30.7,72.38 24.2,72.38 23.85,72.03 23.85,71.9 21.91,69.96 20.46,69.96 16.72,66.22 16.72,65.94 U2.21 | v96.91,23.77 100.99,23.77 102.72,22.04 102.79,22.04
  Bottom 0.15: v45.25,57.84 53.35,57.84 87.42,23.77 v96.91,23.77
FLASH_CS
  Top 0.15: D6.1 88.74,22.04 83.89,26.88 R9.1 83.82,27.92 66.23,27.92 44.14,50.01 37.63,50.01 36.45,51.19 36.45,53.96 35.34,55.07 U1.1 35.34,55.14 28.21,55.14 21.77,48.7 21.77,48.42 U2.12
GDR
  Top 0.15: J1.2 106.74,15.18 106.74,14.77 104.04,12.06 85.62,12.06 83.61,14.07 R4.2 83.54,14.14 81.05,14.14 79.73,15.46 79.39,15.46 Q3.1
GND  (via drill 0.3)
  Top 0.15: 35.41,50.78 35.41,47.73 38.05,45.1 D9.2 38.05,45.03 v37.28,44.27 | 35.41,50.78 35.41,51.33 U1.4 | v36.24,50.78 35.41,50.78 | v37.91,50.78 37.91,51.88 39.29,53.27 U1.9 | 16.3,98.14 16.3,91.91 15.54,91.15 J4.G2 15.54,91.08 16.3,90.32 16.3,87.27 15.54,86.51 15.54,85.47 J4.G1 15.47,82.35 7.85,74.74 7.85,65.94 U2.28 7.78,65.87 7.78,61.51 12.29,57.01 U2.29_3 12.29,56.94 13.46,56.94 U2.29_6 13.53,56.94 14.71,56.94 U2.29_9 14.78,56.87 14.78,55.69 U2.29_8 14.78,55.62 14.78,54.45 U2.29_7 14.71,54.45 13.53,54.45 U2.29_4 13.46,54.45 12.35,54.45 U2.29_1 | 16.3,98.14 16.3,98.97 D8.2 | U2.29_1 12.29,54.45 12.29,55.62 U2.29_2 12.35,55.62 13.46,55.62 U2.29_5 | v7.78,49.94 U2.1 | v11.59,53.75 12.21,54.38 U2.29_1 | C10.2 52.52,109.22 52.52,109.08 53.14,108.46 53.14,107.49 53,107.35 51.34,107.35 50.72,107.98 CHANGE_BUTTON.2 50.65,107.98 49.89,107.21 46.35,107.21 37.91,98.77 37.91,98.49 39.71,96.69 42.34,96.69 IC1.3 42.41,96.69 v43.38,96.69 | C6.2 67.68,109.36 67.68,109.15 68.31,108.53 68.31,107.63 68.17,107.49 66.3,107.49 65.81,107.98 BOOT_BUTTON.2 65.75,107.98 56.4,98.63 46.7,98.63 C_DELAY.2 46.63,98.63 46.08,99.18 v45.87,99.18 | 4.01,97.42 2.17,95.58 J4.G4 2.17,95.51 1.27,94.61 1.27,82.42 J4.G3 | 4.01,97.42 7.85,101.26 7.85,101.47 C9.2 7.92,101.54 16.23,109.85 21.22,109.85 21.36,109.71 21.36,108.88 21.49,108.74 23.09,108.74 23.78,108.05 25.72,108.05 RESET_BUTTON.2 25.79,107.98 27.1,109.29 27.59,109.29 C5.2 27.66,109.29 v30.7,109.29 | 4.01,97.42 6.05,95.37 6.05,93.36 5.43,92.74 4.94,92.74 J4.P6 | v16.51,98.14 16.3,98.14 | J1.MP1 108.27,12.76 108.27,18.99 107.36,19.89 EPD_C1.1 107.36,19.96 107.99,20.58 107.99,21.69 107.85,21.83 106.81,21.83 106.6,21.62 106.6,21.21 105.56,20.17 105.56,19.96 EPD_C2.1 105.5,19.89 105.5,19.61 v105.08,19.2
  Top 0.15: 103.83,19.13 103.83,19.68 103.69,19.82 EPD_C5.1 | 103.83,19.13 103.83,15.25 J1.8 103.76,15.18 103.76,14.7 103,13.93 100.16,13.93 99.33,14.77 99.26,14.77 | EPD_C6.1 100.3,19.82 EPD_C7.1 100.3,19.75 100.3,19.2 99.33,18.23 99.33,15.25 J1.17 99.26,15.18 99.26,14.77 | 99.26,14.77 97.25,12.76 94.83,12.76 J1.MP2 94.76,12.76 86.38,12.76 85,14.14 R4.1 84.93,14.14 84.93,17.6 EPD_C12.1 | v103.97,19.13 103.83,19.13 | 37.28,25.01 41.3,25.01 41.44,25.15 D11.2 41.51,25.15 43.45,25.15 D10.2 43.52,25.08 68.72,25.08 78.28,15.53 78.35,15.53 | 37.28,25.01 36.18,25.01 D12.2 | SJ1.1 78.07,9.64 78.28,9.85 78.28,11.51 R2.1 78.35,11.58 78.35,15.53 | EPD_C12.1 84.79,17.67 86.38,17.67 EPD_C11.1 | 78.35,15.53 80.56,17.74 84.03,17.74 | 84.03,17.74 84.72,17.74 EPD_C12.1 | 152.65,8.74 153.21,8.74 C2.2 | 152.65,8.74 152.03,8.74 C1.2 | 153.28,13.93 153.28,13.31 152.79,12.83 152.59,12.83 SENSOR2.5 152.65,12.76 152.65,8.74 | 153.28,13.93 152.86,14.35 152.59,14.35 SENSOR2.7 | 153.28,13.93 153.35,13.93 154.59,15.18 155.42,15.18 SENSOR2.1 155.49,15.25 157.99,17.74 165.33,17.74 J3.1 165.4,17.81 165.67,17.81 166.23,18.37 166.23,27.23 159.86,33.6 TP5.TP | J2.B1 164.5,57.35 164.5,57.56 J2.A12 164.56,57.63 164.56,57.77 | 164.56,57.77 164.56,58.81 165.05,59.29 J2.MP4 165.12,59.36 169,59.36 J2.MP2 | TP4.TP 155.35,33.67 159.86,33.67 TP5.TP | R2-USB.2 153.83,53.61 152.59,52.37 R2-USB1.1 152.65,52.37 153.83,51.19 164.43,51.19 J2.B12 164.5,51.19 164.5,50.91 J2.A1 164.56,50.84 164.56,49.67 165.05,49.18 J2.MP3 | 166.23,49.18 165.12,49.18 J2.MP3 | 166.23,49.18 169,49.18 J2.MP1 | 159.93,37.34 159.93,33.74 TP5.TP
  Top 0.15: 159.93,37.34 165.05,42.47 165.05,49.11 J2.MP3 | 164.56,57.77 165.81,57.77 166.23,57.35 166.23,49.18 | C1_BAT.2 128.83,59.5 128.83,57.08 131.12,54.79 R2_BAT.1 | R2_BAT.1 131.12,54.86 134.79,58.53 134.79,59.36 134.16,59.99 133.96,59.99 MCP73831.2 133.89,60.05 133.61,60.05 133.06,60.61 133.06,61.3 133.54,61.79 139.36,61.79 C2_BAT.2 139.43,61.92 139.43,61.79 140.47,60.75 140.47,57.22 140.54,57.15 U4.1 140.67,57.08 140.95,57.08 141.64,56.38 U4.9 | C5_USB.2 156.53,61.09 155.01,61.09 153.28,59.36 153.28,59.02 152.72,58.46 152.45,58.46 D1.2 152.38,58.46 151.96,58.46 151.13,59.29 150.44,59.29 C4_USB.2 150.37,59.29 149.68,59.29 | U4.4 140.67,55.62 140.95,55.62 141.64,56.32 U4.9 | U4.9 141.71,56.32 141.85,56.18 142.54,56.18 U4.6 142.61,56.11 143.51,56.11 146.7,59.29 149.68,59.29 | 126.55,45.03 127.24,45.03 R1_PWRUSB.1 | 126.55,45.03 125.85,45.03 C1_BAT2.2 | 129.14,44.09 129.8,44.75 131.05,44.75 131.26,44.54 131.26,43.78 | 129.14,44.09 126.13,41.08 125.99,41.08 C1_BAT1.2 125.85,41.08 104.66,41.08 102.52,38.93 v102.45,38.93 102.45,32.98 D3.1 102.93,32.91 102.45,32.91 97.25,27.71 96.08,27.71 C7.2 96.01,27.71 96.01,21.76 | 131.26,43.78 130.77,43.3 130.63,43.3 IC4.2 | v126.55,45.58 126.55,45.03 | 129.14,44.09 v128.62,44.61 | C3.- 137,43.64 131.46,43.64 131.32,43.78 131.26,43.78 | C10_SUPERCAP.1 93.86,51.33 92.89,50.36 91.71,50.36 C8.2 91.64,50.36 91.44,50.57 v90.88,50.57 | v84.23,50.57 84.1,50.43 84.1,49.18 U3.13 | 94.35,19.96 92.27,19.96 90.26,21.97 D6.2 90.19,21.97 89.5,21.27 85.9,21.27 84.03,19.41 84.03,17.74 | 94.35,19.96 94.97,19.96 EPD_C10.1
  Top 0.15: 95.73,21.62 95.73,21.14 96.77,20.1 96.77,19.89 EPD_C9.1 | 95.73,21.62 95.52,21.83 94.48,21.83 94.35,21.69 94.35,19.96 | 96.01,21.76 95.94,21.76 95.8,21.62 95.73,21.62 | 96.01,21.76 97.32,21.76 97.53,21.55 97.53,21.07 98.57,20.03 98.57,19.89 EPD_C8.1 | v128.49,50.91 131.12,53.55 131.12,54.72 R2_BAT.1 | 149.68,59.29 149.68,51.75 152.86,48.56 152.86,44.34 159.86,37.34 159.93,37.34 | 37.28,25.01 v37.28,28.55
  Bottom 0.15: v37.91,50.78 v36.24,50.78 14.64,50.78 11.66,53.75 v11.59,53.75 v7.78,49.94 | v45.87,99.18 v43.38,96.69 43.31,96.69 40.23,99.77 | v30.7,109.29 40.23,99.77 | v16.51,98.14 38.6,98.14 40.23,99.77 | v105.08,19.2 104.04,19.2 v103.97,19.13 | 127.66,45.58 v126.55,45.58 | v128.62,44.61 127.66,45.58 | v84.23,50.57 v90.88,50.57 90.88,50.5 v102.45,38.93 | v128.49,50.91 128.49,46.48 127.66,45.65 127.66,45.58 | v37.28,28.55 v37.28,44.27
  pour Top: 6.46,48.1 6.44,48.08 6.42,48.07 0.08,48.07 0.08,0.08 92.22,0.08 92.22,9.83 92.23,9.86 92.25,9.88 92.28,9.89 92.39,9.89 110.48,10.09 110.48,10.09 110.5,10.09 110.51,10.09 110.51,10.09 110.52,10.09 110.53,10.08 110.54,10.08 110.54,10.08 110.54,10.08 110.55,10.07 110.56,10.06 110.56,10.05 110.56,10.05 110.57,10.04 110.58,10.03 110.58,10.03 110.58,10.03 110.58,10.01 110.58,10 110.58,10 110.58,0.09 170.22,0.09 170.22,67.12 92.18,67.12 92.16,67.14 92.14,67.16 92.12,67.18 92.12,111.12 71.28,111.12 71.28,110.28 71.26,110.26 71.24,110.24 71.22,110.22 18.68,110.22 18.66,110.24 18.64,110.26 18.62,110.28 18.62,111.12 0.08,111.12 0.08,66.28 6.42,66.28 6.44,66.26 6.46,66.24 6.48,66.22 6.48,48.13
  pour Bottom: 6.46,48.1 6.44,48.08 6.42,48.07 0.08,48.07 0.08,0.08 92.22,0.08 92.22,9.83 92.23,9.86 92.25,9.88 92.28,9.89 92.39,9.89 110.48,10.09 110.48,10.09 110.5,10.09 110.51,10.09 110.51,10.09 110.52,10.09 110.53,10.08 110.54,10.08 110.54,10.08 110.54,10.08 110.55,10.07 110.56,10.06 110.56,10.05 110.56,10.05 110.57,10.04 110.58,10.03 110.58,10.03 110.58,10.03 110.58,10.01 110.58,10 110.58,10 110.58,0.09 170.22,0.09 170.22,67.12 92.18,67.12 92.16,67.14 92.14,67.16 92.12,67.18 92.12,111.12 71.28,111.12 71.28,110.28 71.26,110.26 71.24,110.24 71.22,110.22 18.68,110.22 18.66,110.24 18.64,110.26 18.62,110.28 18.62,111.12 0.08,111.12 0.08,66.28 6.42,66.28 6.44,66.26 6.46,66.24 6.48,66.22 6.48,48.13
GPIO8
  Top 0.15: R1.1 19.21,43.85 19.21,44.06 19.83,44.68 19.83,47.52 19.28,48.08 19.28,48.35 U2.10
I2C_PW  (via drill 0.3)
  Top 0.15: R1_PINH.2 154.52,8.74 155.7,8.74 R2_PINH.2 | SENSOR2.2 155.42,14.35 155.15,14.35 154.73,13.93 154.73,8.81 R1_PINH.2 | R1_PINH.2 154.46,8.67 153.28,7.49 C2.1 153.21,7.43 152.03,7.43 C1.1 151.96,7.49 151.96,7.63 151.34,8.26 151.34,12.69 152.24,13.59 SENSOR2.6 152.52,13.66 152.24,13.66 151.82,14.07 151.82,14.7 | 151.82,14.7 152.31,15.18 152.52,15.18 SENSOR2.8 | v22.6,64.76 21.77,65.59 21.77,65.87 U2.17 | v141.23,25.22 151.75,14.7 151.82,14.7
  Bottom 0.15: v22.6,64.76 25.58,64.76 31.54,58.81 75.3,58.81 108.89,25.22 v141.23,25.22
INT_RTC  (via drill 0.3)
  Top 0.15: 85.07,62.48 85.07,58.67 85.27,58.46 U3.3 | 85.07,62.48 85.07,62.69 85.27,62.89 87.7,62.89 91.37,59.22 91.37,58.32 90.75,57.7 90.75,57.56 R1-PINH1.1 | v16.72,64.76 16.72,48.42 U2.8 | v16.72,67.4 20.73,71.41 TP15.TP 20.8,71.41 v21.77,70.44 | v84.65,62.48 85.07,62.48
  Bottom 0.15: v16.72,67.4 v16.72,64.76 | v84.65,62.48 29.74,62.48 v21.77,70.44
IO/BOOT  (via drill 0.3)
  Top 0.15: C6.1 67.61,108.12 67.2,108.12 66.58,108.74 63.11,108.74 62.35,109.5 BOOT_BUTTON.4 62.21,109.5 60.97,108.25 60.69,108.25 R_BOOT.1 60.62,108.18 v60,107.56 | v24.33,71.9 24.33,65.94 U2.15
  Bottom 0.15: v60,107.56 v24.33,71.9
IO/CHANGE
  Top 0.15: C10.1 52.45,107.98 52.24,107.98 51.48,108.74 47.95,108.74 47.26,109.43 CHANGE_BUTTON.4 47.19,109.5 45.73,108.05 45.45,108.05 R_CHANGE.1 45.39,107.98 37.63,100.22 37.63,90.66 14.15,67.19 14.15,65.94 U2.23
MISO  (via drill 0.3)
  Top 0.15: v42.27,20.44 42.2,20.44 41.58,19.82 R7.1 | v42.27,22.87 41.51,23.63 D11.1 | 34.24,52.44 35.34,53.55 35.34,53.89 U1.2 | v34.24,43.78 34.24,52.44 | 14.09,75.22 9.1,70.23 9.1,65.94 U2.27 | 14.09,75.22 19.42,75.22 20.52,76.33 TP6.TP | v7.09,83.18 3.91,86.37 3.91,93.16 4.53,93.78 5.01,93.78 J4.P7 | 14.09,75.22 v14.09,76.19 | 34.24,52.44 30.64,52.44 v28.42,54.65
  Bottom 0.15: v42.27,20.44 v42.27,22.87 42.27,22.94 34.24,30.97 v34.24,43.78 | v7.09,83.18 v14.09,76.19 14.09,76.12 17.2,73 17.2,66.98 28.42,55.76 v28.42,54.65
MOSI  (via drill 0.3)
  Top 0.15: J4.P3 6.4,89.42 15.54,98.56 15.54,99.6 15.68,99.73 16.79,99.73 16.99,99.53 16.99,76.95 16.51,76.47 TP7.TP 16.79,76.67 v17.76,75.7 | v100.92,16.7 100.79,16.57 100.79,15.25 J1.14 | v47.74,15.73 43.66,19.82 R6.1 43.66,19.89 44.28,20.51 44.28,21.55 43.52,22.31 43.52,23.63 D10.1 | v43.24,50.78 43.24,51.33 U1.5 | v16.3,47.24 15.47,48.08 15.47,48.35 U2.7
  Bottom 0.15: v100.92,16.7 101.41,16.7 101.75,16.36 101.75,16.08 101.41,15.73 v47.74,15.73 47.74,15.8 43.24,20.31 43.24,47.24 | 43.24,47.24 v43.24,50.78 | 43.24,47.24 38.39,47.24 | 38.39,47.24 v16.3,47.24 | v17.76,75.7 17.76,66.84 28,56.59 32.02,56.59 37.35,51.26 38.05,51.26 38.39,50.91 38.39,47.24
N$1
  Top 0.15: R2-USB1.2 153.9,52.37 163.32,52.37 163.94,52.99 164.5,52.99 J2.A5
N$2
  Top 0.15: R2-USB.1 152.59,53.61 152.59,56.38 153.83,57.63 153.83,59.5 154.25,59.92 155.63,59.92 155.91,59.64 155.91,59.16 159.03,56.04 164.5,56.04 J2.B5
N$4
  Top 0.15: C1_BAT1.1 129.39,41.08 130.56,42.26 IC4.3 | IC4.1 130.56,44.13 130.36,44.13 129.87,43.64 129.87,42.88 130.49,42.26 IC4.3 | 139.46,43.54 138.74,44.27 138.74,50.84 Q1.2 | 139.46,43.54 140.81,42.19 140.81,41.29 D2.1 | 139.46,43.54 138.32,42.4 135.83,42.4 135.41,42.81 132.85,42.81 132.36,42.33 130.63,42.33 IC4.3
N$5
  Top 0.15: J1.24 95.8,15.25 89.98,15.25 86.87,18.37 85.41,18.37 84.79,18.99 EPD_C12.2
N$6
  Top 0.15: C4.1 108.47,34.02 107.5,34.02 D3.2 106.39,32.91 103.07,29.59 103.07,28.89 D4.1
N$7
  Top 0.15: R2_BAT.2 131.19,56.04 131.19,58.95 131.26,59.02 MCP73831.5
N$8
  Top 0.15: CHG_LED.C 127.38,60.95 124.95,60.95 124.26,61.65 122.81,61.65 122.18,61.03 R1_BAT.1
N$9
  Top 0.15: R1_BAT.2 123.5,60.95 124.54,60.95 125.23,60.26 132.43,60.26 133.61,59.09 133.89,59.09 MCP73831.1
N$10
  Top 0.15: J1.23 96.28,15.25 96.28,15.6 92.96,18.92 86.45,18.92 EPD_C11.2
N$11
  Top 0.15: J1.22 96.77,15.25 96.77,18.78 95.73,19.82 95.73,20.51 95.04,21.21 EPD_C10.2
N$12
  Top 0.15: J1.21 97.32,15.25 97.32,19.27 97.53,19.47 97.53,20.44 96.84,21.14 EPD_C9.2
N$13
  Top 0.15: J1.20 97.81,15.25 97.81,17.95 99.26,19.41 99.26,20.51 98.64,21.14 EPD_C8.2
N$14
  Top 0.15: J1.19 98.36,15.25 98.36,18.09 99.61,19.34 99.61,20.44 100.23,21.07 EPD_C7.2
N$15  (via drill 0.3)
  Top 0.15: v98.85,16.7 98.85,15.25 J1.18 | v101.27,20.44 EPD_C6.2
  Bottom 0.15: v98.85,16.7 99.06,16.7 101.27,18.92 v101.27,20.44
N$16
  Top 0.15: J1.5 105.29,15.25 105.29,18.37 104.59,19.06 104.59,20.31 105.5,21.21 EPD_C2.2
N$17
  Top 0.15: J1.4 105.84,15.25 105.84,19.13 106.6,19.89 106.6,20.51 107.3,21.21 EPD_C1.2
N$18
  Top 0.15: C_DELAY.1 46.63,97.38 46.35,97.38 45.18,98.56 IC1.5
N$19
  Top 0.15: R_CAPACITOR.1 83.27,45.58 83.27,61.72 85.2,63.66 D7.1
N$21
  Top 0.15: R8.1 36.24,19.89 36.24,20.1 36.87,20.72 36.87,22.73 36.18,23.42 D12.1
RESE
  Top 0.15: J1.3 106.33,15.25 106.33,15.6 106.53,15.8 107.57,15.8 107.71,15.67 107.71,14.77 103.28,10.33 81.6,10.33 81.47,10.2 R3.2 81.6,10.4 81.6,10.68 79.39,12.9 79.39,14.14 Q3.2
RESE'
  Top 0.15: R2.2 79.6,11.51 79.6,9.64 SJ1.2 79.67,9.57 80.36,8.88 81.4,8.88 R3.1
RESET  (via drill 0.3)
  Top 0.15: v19.97,108.6 20.59,107.98 R_RESET.1 | v23.36,109.08 22.67,109.08 22.33,109.43 RESET_BUTTON.4 | v28.28,108.67 27.66,108.05 C5.1 | v38.39,98.63 42.34,98.63 IC1.1 | v6.81,82.63 6.81,54.58 10.28,51.12 10.28,48.42 U2.3
  Bottom 0.15: v38.39,98.63 28.35,108.67 v28.28,108.67 23.85,108.67 23.43,109.08 v23.36,109.08 22.88,108.6 v19.97,108.6 19.97,108.53 6.61,95.17 6.61,83.05 6.81,82.84 v6.81,82.63
RTC_RST
  Top 0.15: U2.16 23.09,65.87 23.09,62.89 30.36,55.62 35.97,55.62 37.35,54.24 37.35,50.71 37.77,50.29 76.2,50.29 81.6,44.89 83.61,44.89 83.89,45.17 83.89,47.38 84.72,48.21 84.72,57.77 84.1,58.39 U3.4
RX
  Top 0.15: U2.24 12.91,65.94 12.91,67.67 16.72,71.48 TP2.TP
SCK  (via drill 0.3)
  Top 0.15: v6.12,92.19 5.57,91.63 5.08,91.63 J4.P5 | v11.11,77.37 12.08,76.4 TP8.TP | v11.11,54.1 11.11,51.68 14.09,48.7 14.09,48.42 U2.6 14.15,48.35 14.15,45.23 17.62,41.77 34.44,41.77 36.31,43.64 R5.1 36.38,43.64 38.05,43.64 D9.1 38.12,43.64 v44,49.53 | v101.27,16.22 101.27,15.25 J1.13 | v43.79,52.09 43.24,52.64 U1.6
  Bottom 0.15: v6.12,92.19 6.12,82.35 v11.11,77.37 v11.11,54.1 | v101.27,16.22 79.67,16.22 45.18,50.71 | v43.79,52.09 45.18,50.71 | 45.18,50.71 v44,49.53
SCL  (via drill 0.3)
  Top 0.15: 155.81,12.45 155.49,12.76 SENSOR2.4 | 155.81,12.45 156.39,11.86 156.39,8.26 155.77,7.63 155.77,7.43 R2_PINH.1 | v143.38,56.59 142.61,56.59 U4.7 | v164.63,21.48 165.33,20.79 J3.4 | v156.46,13.1 155.81,12.45 | v19.69,67.26 19.07,67.26 17.96,66.15 17.96,65.94 U2.20 | v86.24,51.05 87.84,49.46 87.84,49.18 U3.16
  Bottom 0.15: 143.38,51.4 143.38,42.74 v164.63,21.48 164.63,21.41 156.46,13.24 v156.46,13.1 | 143.38,51.4 v143.38,56.59 | v19.69,67.26 23.5,67.26 31.67,59.09 78.21,59.09 v86.24,51.05 86.31,51.05 86.66,51.4 143.38,51.4
SDA  (via drill 0.3)
  Top 0.15: 156.95,13.24 156.95,7.49 156.25,6.8 155.15,6.8 154.52,7.43 R1_PINH.1 | 156.95,13.24 156.6,13.59 155.49,13.59 SENSOR2.3 | v143.72,57.08 142.61,57.08 U4.8 | v151.89,34.85 151.89,32.91 164.32,20.48 | 164.32,20.48 164.98,19.82 165.33,19.82 J3.3 | v157.09,13.24 156.95,13.24 | v164.29,20.44 164.32,20.48 | v23.85,67.53 20.59,67.53 19.28,66.22 19.28,65.94 U2.19 | v85.76,52.16 85.76,50.29 86.52,49.53 86.52,49.18 U3.15
  Bottom 0.15: v151.89,34.85 151.89,48.7 143.72,56.87 v143.72,57.08 90.75,57.08 85.83,52.16 v85.76,52.16 78.56,59.36 32.44,59.36 24.27,67.53 v23.85,67.53 | v164.29,20.44 v157.09,13.24
SRC  (via drill 0.3)
  Top 0.15: v102.93,35.4 108.47,35.4 C4.2 | v99.33,35.4 98.15,35.4 97.57,35.99 | 97.57,35.99 97.12,36.44 D5.2 | v83.89,17.26 81.53,14.9 Q3.3 | v89.91,23.28 89.91,24.04 93.1,27.23 93.1,31.52 L1.1 93.17,31.59 97.57,35.99
  Bottom 0.15: v99.33,35.4 v102.93,35.4 | v89.91,23.28 v83.89,17.26
SS_SD
  Top 0.15: J4.P2 5.5,88.31 7.58,86.23 7.58,67.19 7.09,66.7 7.09,54.72 11.52,50.29 11.52,48.42 U2.4
SS_SD1
  Top 0.15: R10.1 10.35,100.22 13.53,100.22 14.71,99.04 D8.1
TX
  Top 0.15: U2.25 11.59,65.94 11.59,71 12.01,71.41 TP1.TP
USB_D+  (via drill 0.3)
  Top 0.15: v140.95,59.92 150.92,59.92 151.41,59.43 152.38,59.43 D1.1 | v31.88,56.11 v35.69,59.92 | v27.03,51.26 27.03,51.12 24.33,48.42 U2.14
  Bottom 0.15: v35.69,59.92 v140.95,59.92 | v27.03,51.26 v31.88,56.11
USB_D-  (via drill 0.3)
  Top 0.15: v151.13,57.49 152.38,57.49 D1.3 | v30.5,56.11 v34.79,60.4 | v25.65,51.26 23.09,48.7 23.09,48.42 U2.13
  Bottom 0.15: v151.13,57.49 144,57.49 141.09,60.4 v34.79,60.4 | v25.65,51.26 v30.5,56.11
VBAT
  Top 0.15: 139.32,55.17 140.26,56.11 140.54,56.11 U4.3 140.6,56.18 140.6,56.59 U4.2 140.54,56.59 140.33,56.59 139.43,57.49 139.43,60.61 C2_BAT.1 139.36,60.68 139.15,60.89 133.96,60.89 MCP73831.3 | 139.32,55.17 137.77,53.61 137.77,53.06 Q1.3 | 139.32,55.17 155.29,39.21 155.42,39.21 TP3.TP
VBUS  (via drill 0.3)
  Top 0.3: 128.45,50.12 129.18,50.84 136.73,50.84 Q1.1 137.56,51.68 139.15,51.68 140.81,50.01 140.81,43.37 D2.2 | 128.45,50.12 125.02,46.69 125.02,44.54 125.23,44.34 127.86,44.34 128.07,44.54 128.07,45.51 127.31,46.27 R1_PWRUSB.2 | 128.45,50.12 127.59,50.98 127.59,59.5 C1_BAT.1 127.38,59.57 122.32,59.57 121.49,60.4 121.49,61.58 121.98,62.06 127.66,62.06 128.76,60.95 CHG_LED.A 128.97,60.95 131.26,60.95 MCP73831.4 131.39,61.09 132.92,62.62 156.32,62.62 157.36,61.58 157.36,60.61 156.6,59.85 C5_USB.1 156.6,59.71 v156.6,59.09 | TP14.TP 159.93,39.14 159.93,41.91 155.77,46.07 PFMF.050.1.2 155.7,46.27 150.44,51.54 150.44,58.05 C4_USB.1 150.58,58.12 v151.48,58.12 | v155.98,58.46 154.94,58.46 D1.5
  Bottom 0.3: v156.6,59.09 v155.98,58.46 155.84,58.39 155.56,58.12 v151.48,58.12
VRTC
  Top 0.15: C10_SUPERCAP.2 93.86,49.11 93.79,49.04 91.71,49.04 C8.1 91.64,48.97 89.29,48.97 88.18,47.87 85.83,47.87 85.34,48.35 U3.14 85.27,49.11 85.27,48.35 84.51,47.59 84.51,45.58 R_CAPACITOR.2
VUSB  (via drill 0.3)
  Top 0.3: J2.A9 164.5,56.73 164.5,56.52 J2.B4 164.63,56.45 165.19,56.45 165.74,55.9 165.74,52.58 165.19,52.02 164.63,52.02 J2.B9 164.5,51.95 164.5,51.75 J2.A4 164.36,51.68 v156.67,51.68 | v152.38,47.38 151.27,46.27 PFMF.050.1.1
  Bottom 0.3: v152.38,47.38 v156.67,51.68

## Text on the board
tNames: Serial No: | OpenBook v1.1